# Altium PCB seyed_parsa_parsaian.PcbDoc
Units mm, origin at the board's own origin, x right, y up, seen from the top; angles counter-clockwise.
Board outline 99.82 x 75.06 mm, 2 copper layers (Top Layer, Bottom Layer); 28 components, 23 nets, 118 pads, 52 vias.
Unrouted connection lines stored in the file: 1.
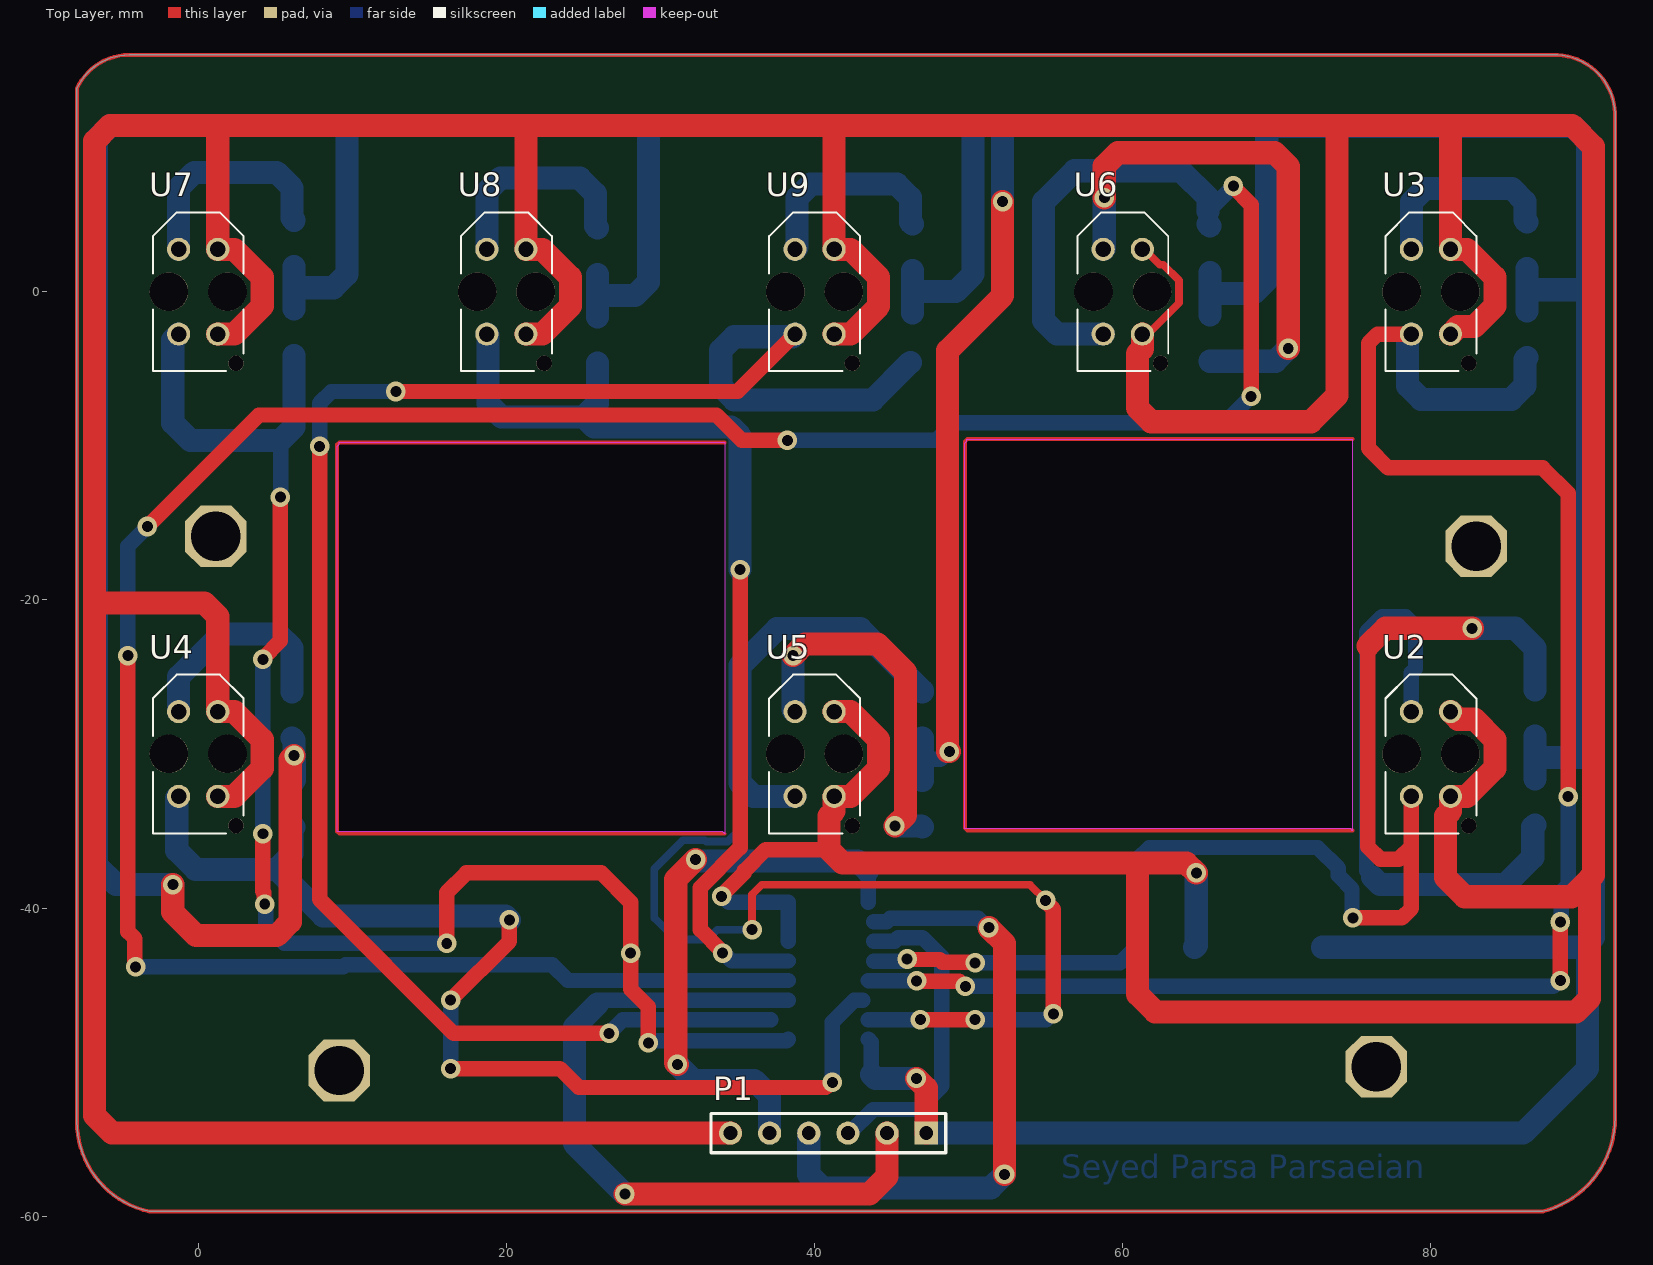
[diagram p0: Top Layer view]
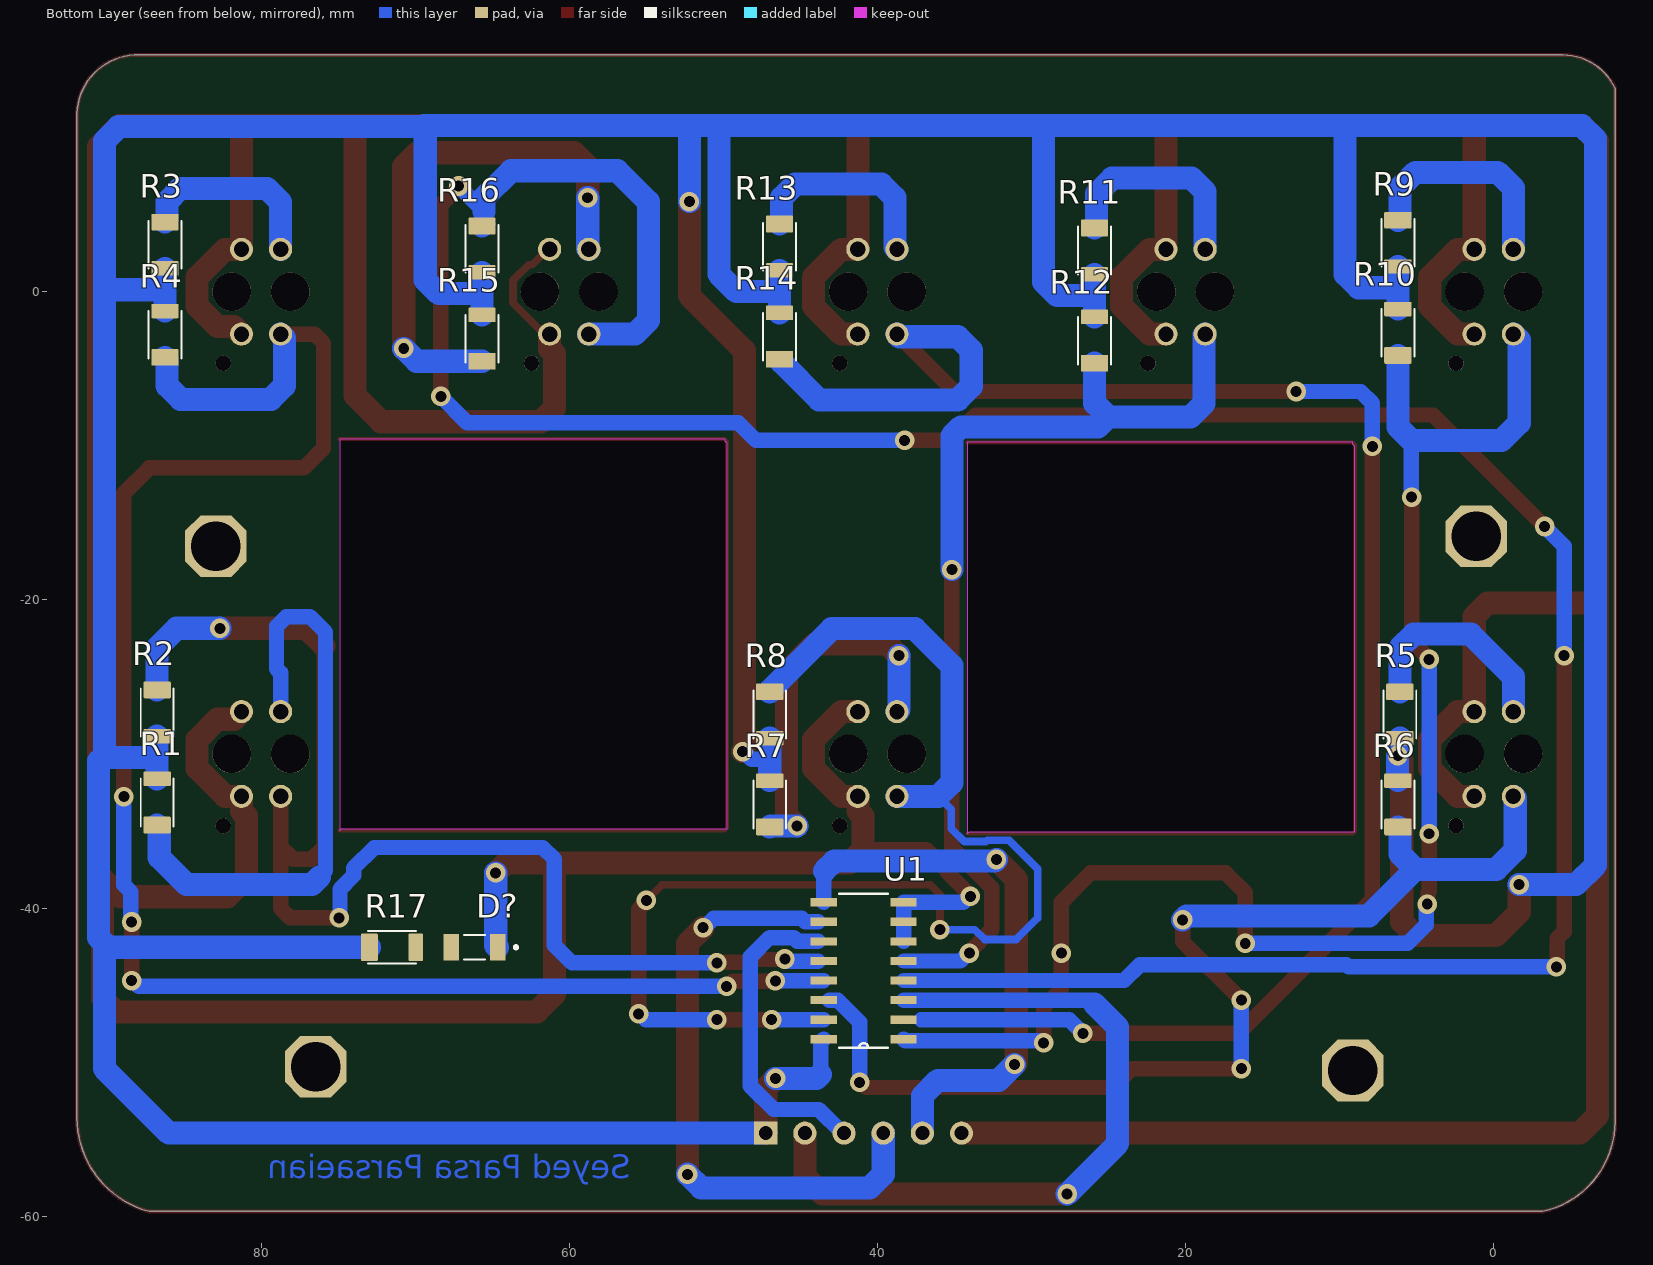
[diagram p1: Bottom Layer view, seen from below]
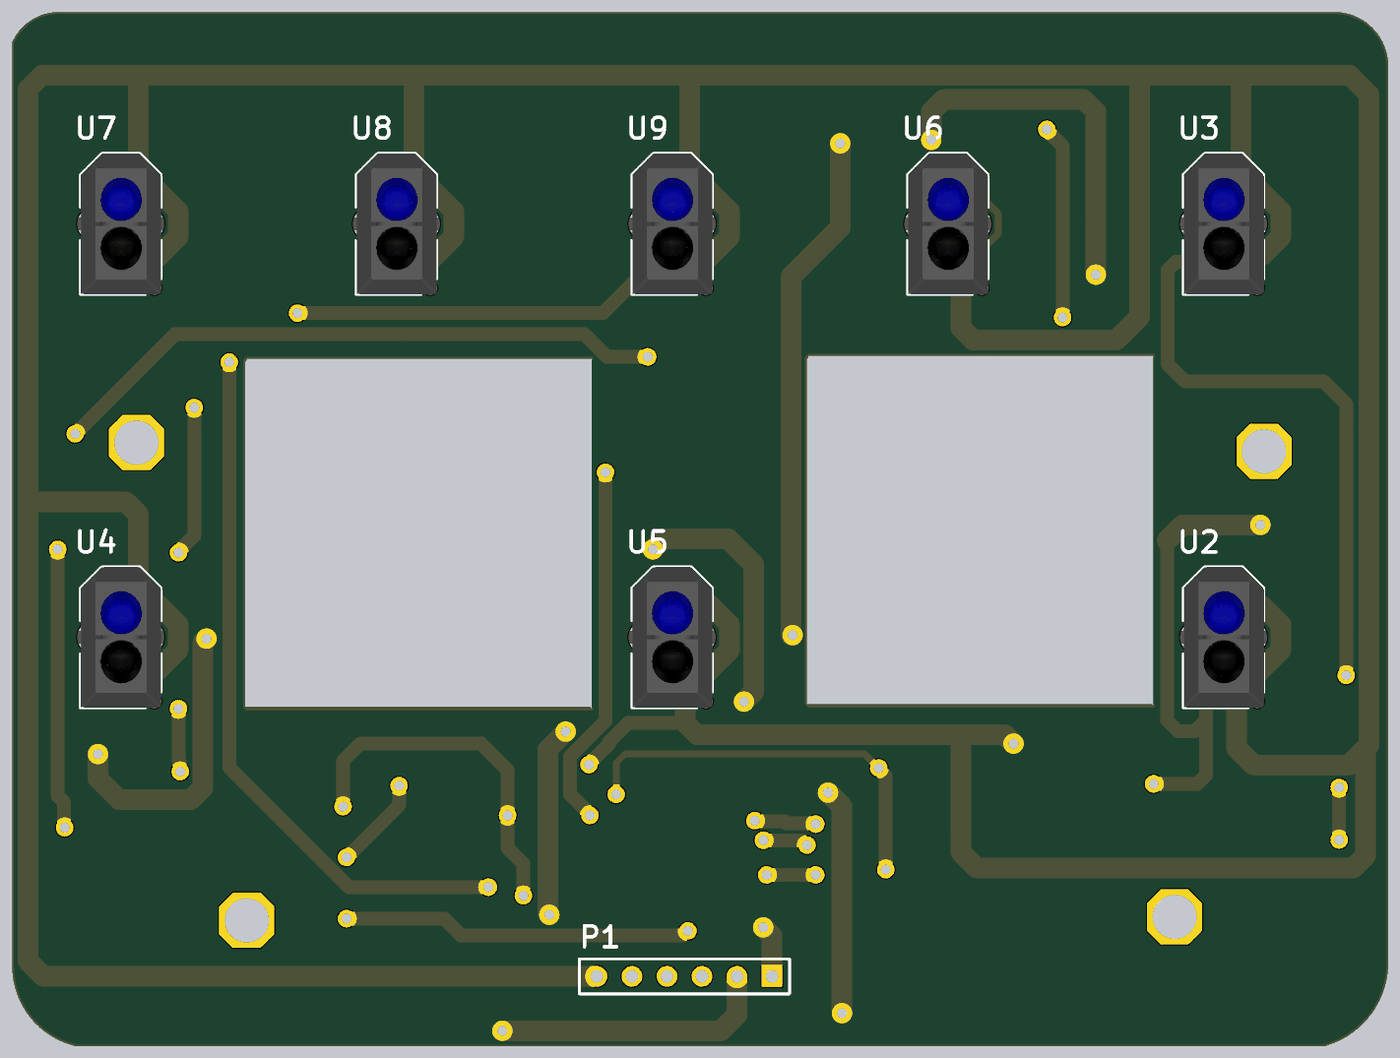
[diagram p2: 3D render of the assembled board from above, using the file's embedded part models]
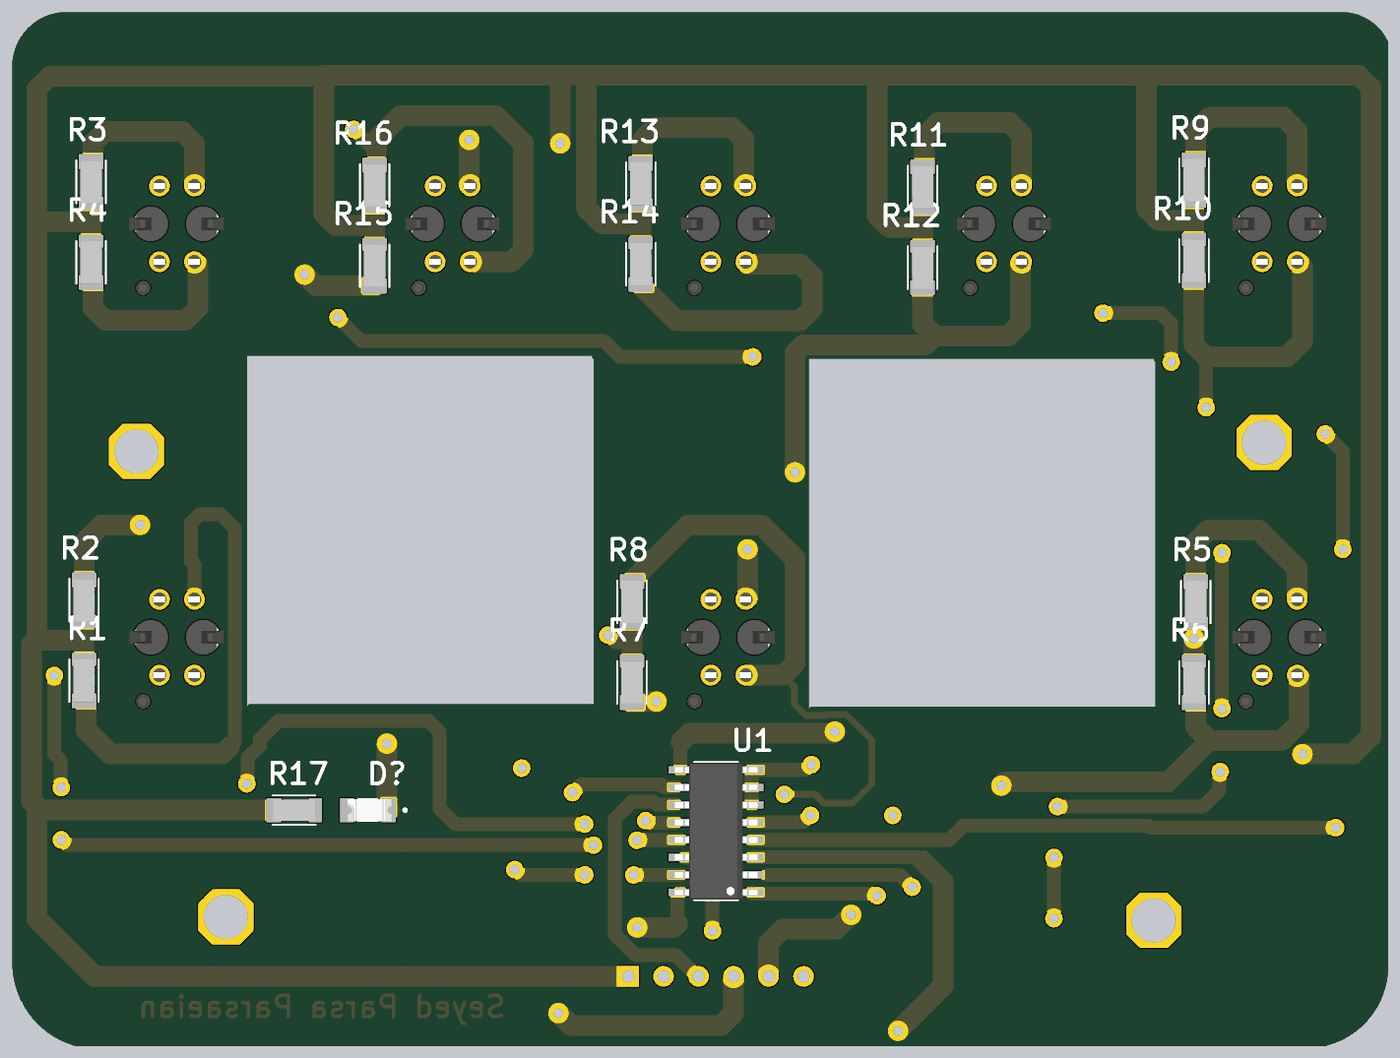
[diagram p3: 3D render of the assembled board from below, using the file's embedded part models]

## Layer stack, top to bottom
Top Solder: solder mask 0.0102, Solder Resist, Dk 3.5
Top Layer: signal copper 0.0356
Dielectric 1: dielectric 0.32, FR-4, Dk 4.8
Bottom Layer: signal copper 0.0356
Bottom Solder: solder mask 0.0102, Solder Resist, Dk 3.5

## Board outline
-7.874,-53.854 -7.874,13.183 cw(c-4.483,11.642) -4.483,15.367 88.211,15.367 cw(c88.014,11.433) 91.948,11.236 91.948,-53.608 cw(c85.659,-53.608) 87.26,-59.69 -3.178,-59.69 cw(c-1.9,-53.854)
cut-out: 49.888,-9.569 74.907,-9.569 74.907,-34.969 74.78,-34.842 49.761,-34.842 49.761,-9.823 49.888,-9.696
cut-out: 9.144,-9.779 34.163,-9.779 34.163,-35.179 34.036,-35.052 9.017,-35.052 9.017,-10.033 9.144,-9.906
cut-out: 9.144,-9.779 34.163,-9.779 34.163,-35.179 34.036,-35.052 9.017,-35.052 9.017,-10.033 9.144,-9.906

## Design rules (kind name [scope] priority, off if disabled: settings)
Clearance [All] p1: gap=0.254 ignorepadtopadclearanceinfootprint=FALSE except(0: Arc-Hole Track-Hole SMDPad-Hole THPad-Hole Via-Hole Fill-Hole Poly-Hole Region-Hole Text-Hole)
PolygonConnect [All] p1: connectstyle=Relief reliefconductorwidth=0.254 reliefentries=4 polygonreliefangle="90 Angle" airgapwidth=0.254
RoutingVias [All] p1: holewidth=0.711 width=1.27 viastyle="Through Hole" minholewidth=0.711 minwidth=1.27 maxholewidth=0.711 maxwidth=1.27
SolderMaskExpansion [All] p1: expansion=0.102 istentingtop=FALSE
Width [All] p1: maxlimit=1.5 minlimit=0.5 preferedwidth=1 minimp=50.000000 maximp=50.000000 favimp=50.000000
30 further rules are at their usual default settings.

## Components (designator, comment, footprint, x,y, rotation, side; value= is the part's Value field where it differs from the comment)
D? "LHN974_RED_LED_1206" LEDC3216X120N 66.153,-42.545 r0 bottom
P1 "Header 6" HDR1X6 47.244,-54.61 r180 top
R1 "4-1879462-2" RESC3115X65N 86.741,-33.147 r90 bottom
R2 "4-1879462-2" RESC3115X65N 86.741,-27.305 r270 bottom
R3 "4-1879462-2" RESC3115X65N 86.233,3.048 r270 bottom
R4 "4-1879462-2" RESC3115X65N 86.233,-2.794 r90 bottom
R5 "4-1879462-2" RESC3115X65N 6.096,-27.432 r270 bottom
R6 "4-1879462-2" RESC3115X65N 6.223,-33.274 r90 bottom
R7 "4-1879462-2" RESC3115X65N 46.99,-33.274 r90 bottom
R8 "4-1879462-2" RESC3115X65N 46.99,-27.432 r270 bottom
R9 "4-1879462-2" RESC3115X65N 6.223,3.175 r270 bottom
R10 "4-1879462-2" RESC3115X65N 6.223,-2.667 r90 bottom
R11 "4-1879462-2" RESC3115X65N 25.908,2.667 r270 bottom
R12 "4-1879462-2" RESC3115X65N 25.908,-3.175 r90 bottom
R13 "4-1879462-2" RESC3115X65N 46.355,2.921 r270 bottom
R14 "4-1879462-2" RESC3115X65N 46.355,-2.921 r90 bottom
R15 "4-1879462-2" RESC3115X65N 65.659,-3.048 r90 bottom
R16 "4-1879462-2" RESC3115X65N 65.659,2.794 r270 bottom
R17 "4-1879462-2" RESC3115X65N 71.501,-42.545 r180 bottom
U1 "74HC4051D" SOIC127P600X175-16N 40.894,-44.069 r0 bottom
U2 "TCRT5000" OPTO_TCRT5000 80,-30 r90 top
U3 "TCRT5000" OPTO_TCRT5000 80,0 r90 top
U4 "TCRT5000" OPTO_TCRT5000 0,-30 r90 top
U5 "TCRT5000" OPTO_TCRT5000 40,-30 r90 top
U6 "TCRT5000" OPTO_TCRT5000 60,0 r90 top
U7 "TCRT5000" OPTO_TCRT5000 0,0 r90 top
U8 "TCRT5000" OPTO_TCRT5000 20,0 r90 top
U9 "TCRT5000" OPTO_TCRT5000 40,0 r90 top

## Footprints (in the part's own frame and the unit in brackets; to place one, negate y for a bottom-side part, rotate by r counter-clockwise, add the part's x,y. Pads: shape width x height; smd on the part's side, far side on the other; paste and mask are expansions set on the pad)
HDR1X6 [mm] "Connector; Header; 6 Position"
  rect 1.5x1.5 hole 0.9: 1(0,0)
  round 1.5 hole 0.9: 2(2.54,0) 3(5.08,0) 4(7.62,0) 5(10.16,0) 6(12.7,0)
  silkscreen extent -1.27,-1.27 13.97,1.27
LEDC3216X120N [mm]
  rect 1.01x1.73 smd: NEG(1.51,0) POS(-1.51,0)
  silkscreen extent -2.8,-0.8 0.68,0.8, body extent -1.73,-0.8 1.47,0.8, height 1.2
OPTO_TCRT5000 [mm]
  round 1.5 hole 1: A(2.75,1.27) CATH(2.75,-1.27) COLL(-2.75,1.27) E(-2.75,-1.27)
  round 1 hole 1 unplated: ""(-4.65,-2.45)
  round 2.5 hole 2.5 unplated: ""(0,1.9) ""(0,-1.9)
  silkscreen extent -5.15,-2.95 5.15,2.95, body extent -5.1,-3.43 5.1,3.37, height 7.2
RESC3115X65N [mm]
  rrect14% 1.09x1.77 smd: 1(-1.465,0)
  rrect14% 0.94x1.77 smd: 2(1.54,0)
  silkscreen extent -1.55,-1.06 1.55,1.06, body extent -1.55,-0.77 1.55,0.77, height 0.53
SOIC127P600X175-16N [mil]
  rect 67x21 smd: 1(-102,175) 2(-102,125) 3(-102,75) 4(-102,25) 5(-102,-25) 6(-102,-75) 7(-102,-125) 8(-102,-175) 9(102,-175) 10(102,-125) 11(102,-75) 12(102,-25) 13(102,25) 14(102,75) 15(102,125) 16(102,175)
  silkscreen extent -62,-197 62,197, body extent -118,-195 118,195, height 69

## Part data
D?: "2.6 V Red LED SMD", Package=None, Availability="Not in stock", Check_prices=https://www.snapeda.com/parts/LHN974%20RED%20LED%201206/Osram/view-part/7899607/?ref=eda, MF=Osram, MP="LHN974 RED LED 1206", Price=None, SnapEDA_Link=https://www.snapeda.com/parts/LHN974%20RED%20LED%201206/Osram/view-part/7899607/?ref=snap
P1: "Header, 6-Pin", LatestRevisionDate=17-Jul-2002, LatestRevisionNote="Re-released for DXP Platform.", Publisher="Altium Limited"
R1 R2 R3 R4 R5 R6 R7 R8 R9 R10 R11 R12 R13 R14 R15 R16 R17: "RES 0.82 OHM 1% 1/4W 1206", Package=1206, Power_Rating=".25 W", Resistance=82, Tolerance=1%, Availability="In Stock", Check_prices=https://www.snapeda.com/parts/4-1879462-2/TE+Connectivity/view-part/?ref=eda, EU_RoHS_Compliance="Compliant with Exemptions", MF="TE Connectivity", MP=4-1879462-2, Price=None, SnapEDA_Link=https://www.snapeda.com/parts/4-1879462-2/TE+Connectivity/view-part/?ref=snap
U1: "1 Circuit IC Switch 8:1 130Ohm 16-SOIC", Package="SOIC-16 Toshiba", Availability="In Stock", Check_prices=https://www.snapeda.com/parts/74HC4051D/Toshiba/view-part/?ref=eda, MF=Toshiba, MP=74HC4051D, Price=None, Purchase-URL=https://pricing.snapeda.com/search/part/74HC4051D/?ref=eda, SnapEDA_Link=https://www.snapeda.com/parts/74HC4051D/Toshiba/view-part/?ref=snap
U2 U3 U4 U5 U6 U7 U8 U9: "950 nm 60 mA Through Hole Reflective Optical Sensor with Transistor Output", Package=None, Availability=Unavailable, MP=TCRT5000, Price=None

## Free pads (board coordinates)
  oct 4x4 hole 3.2: 6(1.143,-15.875) 6(9.144,-50.546) 6(76.454,-50.292) 6(82.931,-16.51)

## Via types
v1: diameter 1.27, hole 0.711, Top Layer to Bottom Layer, 52 vias

## Nets (pads, with @x,y where several pads share a name; then routed paths per layer and width w, separated by ;. In a path a pad name is that pad's centre, name@x,y a point inside that pad or via, vN(x,y) a via of type N, cw(c..) or ccw(c..) an arc to the next point about the centre after c; other vN are vias at no path point)
+5: P1.1 R1.2 R2.2 R3.2 R4.2 R5.2 R6.2 R7.2 R8.2 R9.2 R10.2 R11.2 R12.2 R13.2 R14.2 R15.2 R16.2 R17.1 U1.16 | length 432.4
  Top Layer w1.5: v1(-1.651,-38.481) -1.651,-40.259 -0.127,-41.783 5.09,-41.783 5.969,-40.904 5.969,-30.353 v1(6.223,-30.099) ; v1(46.609,-51.054) 47.244,-51.689 P1.1 ; v1(48.745,-29.845) 48.63,-29.845 48.63,-3.821 52.197,-0.254 v1(52.197,5.842)
  Bottom Layer w1: U1.16 43.688,-48.717 43.688,-50.8 ; 46.99,-30.353 48.163,-30.353 48.671,-29.845 v1(48.745,-29.845)
  Bottom Layer w1.5: v1(-1.651,-38.481) -5.334,-38.481 -6.604,-37.211 -6.604,9.9 -5.725,10.779 9.652,10.779 ; R5.2 6.223,-29.099 v1(6.223,-30.099) 6.257,-30.133 6.257,-31.7 R6.2 ; R10.2 6.223,0.254 ; R9.2 6.223,0.254 ; R12.2 25.908,-0.254 ; R11.2 25.908,-0.254 ; 43.688,-50.8 43.942,-51.054 v1(46.609,-51.054) ; R14.2 46.355,0 ; R13.2 46.355,0 ; R7.2 46.99,-30.353 R8.2 ; P1.1 85.979,-54.61 90.17,-50.419 90.17,-42.291 ; v1(52.197,5.842) 52.197,10.779 ; R15.2 65.659,-0.127 ; R16.2 65.659,-0.127 ; R17.1 89.916,-42.545 90.17,-42.291 ; R4.2 86.233,0.127 ; R3.2 86.233,0.127 ; R1.2 86.741,-30.226 ; R2.2 86.741,-30.226 ; 6.223,0.254 8.773,0.254 9.652,1.133 9.652,10.779 ; 9.652,10.779 29.21,10.779 ; 25.908,-0.254 28.331,-0.254 29.21,0.625 29.21,10.779 ; 29.21,10.779 50.292,10.779 ; 46.355,0 49.149,0 50.292,1.143 50.292,10.779 ; 50.292,10.779 52.197,10.779 ; 52.197,10.779 69.406,10.779 69.342,10.715 ; 65.659,-0.127 68.463,-0.127 69.342,0.752 69.342,10.715 ; 69.342,10.715 89.234,10.715 90.17,9.779 90.17,0.254 ; 86.233,0.127 90.043,0.127 90.17,0.254 ; 86.741,-30.226 90.043,-30.226 90.17,-30.099 ; 90.17,-42.291 90.539,-41.922 90.539,-30.468 90.17,-30.099 ; 90.17,-30.099 90.17,0.254
GND: D?.POS P1.6 U1.6 U1.7 U1.8 U2.CATH U2.E U3.CATH U3.E U4.CATH U4.E U5.CATH U5.E U6.CATH U6.E U7.CATH U7.E U8.CATH U8.E U9.CATH U9.E | length 516.6
  Top Layer w0.5: U6.E 61.461,-2.559 61.822,-2.559 63.654,-0.727 63.654,0.727 62.627,1.754 62.395,1.754 61.399,2.75 U6.CATH
  Top Layer w1: v1(33.972,-39.244) 33.972,-39.171 35.437,-37.705 35.437,-37.588 36.82,-36.205 40.946,-36.205 ; U6.CATH U6.CATH@61.305,2.785
  Top Layer w1.5: U4.E 2.338,-32.75 4.154,-30.934 4.154,-29.066 2.338,-27.25 U4.CATH 1.27,-21.072 0.391,-20.193 -6.731,-20.193 ; U7.E 2.338,-2.75 4.154,-0.934 4.154,0.934 2.338,2.75 U7.CATH 1.27,10.795 ; U8.E 22.338,-2.75 24.154,-0.934 24.154,0.934 22.338,2.75 U8.CATH 21.27,10.729 21.336,10.795 ; P1.6 -5.588,-54.61 -6.731,-53.467 -6.731,-20.193 ; U5.CATH 42.338,-27.25 44.154,-29.066 44.154,-30.934 42.338,-32.75 U5.E 41.27,-33.703 40.946,-34.027 40.946,-36.205 41.825,-37.084 60.96,-37.084 ; U9.E 42.338,-2.75 44.154,-0.934 44.154,0.934 42.338,2.75 U9.CATH 41.27,10.79 41.275,10.795 ; U6.E 61.27,-3.703 60.946,-4.027 60.946,-7.535 61.849,-8.438 72.207,-8.438 73.914,-6.731 73.914,10.668 74.041,10.795 ; v1(64.77,-37.719) 64.135,-37.084 60.96,-37.084 ; U2.CATH 81.766,-27.746 82.834,-27.746 84.154,-29.066 84.154,-30.934 82.338,-32.75 U2.E 81.27,-33.703 80.946,-34.027 80.946,-38.02 82.193,-39.267 89.13,-39.267 90.297,-38.1 ; U3.E 81.766,-2.254 82.834,-2.254 84.154,-0.934 84.154,0.934 82.338,2.75 U3.CATH 81.27,10.658 81.407,10.795 ; -6.731,-20.193 -6.731,9.779 -5.715,10.795 1.27,10.795 ; 1.27,10.795 21.336,10.795 ; 21.336,10.795 41.275,10.795 ; 41.275,10.795 74.041,10.795 ; 60.96,-37.084 60.96,-45.593 62.103,-46.736 89.418,-46.736 90.297,-45.857 90.297,-38.1 ; 74.041,10.795 81.407,10.795 ; 81.407,10.795 89.154,10.795 90.539,9.41 90.539,-37.858 90.297,-38.1
  Bottom Layer w1: v1(33.972,-39.244) 34.045,-39.244 34.424,-39.624 U1.8 U1.7 U1.6
  Bottom Layer w1.5: D?.POS 64.655,-42.545 64.77,-42.43 v1(64.77,-37.719)
NetD?_NEG: D?.NEG R17.2
NetR1_1: R1.1 U2.A | length 39
  Bottom Layer w1: 76.2,-37.973 75.819,-37.592 75.819,-22.098 76.835,-21.082 78.359,-21.082 78.994,-21.717 78.994,-24.474 78.73,-24.738 U2.A
  Bottom Layer w1.5: 76.2,-37.973 76.708,-38.481 84.836,-38.481 86.606,-36.711 86.606,-34.747 R1.1
NetR3_1: R3.1 U3.A | length 12.5
  Bottom Layer w1.5: U3.A 78.74,2.76 78.74,5.825 79.619,6.704 85.246,6.704 86.098,5.852 86.098,4.648 R3.1
NetR5_1: R5.1 U4.A | length 14
  Bottom Layer w1.5: U4.A -1.27,-24.987 1.492,-22.225 5.207,-22.225 6.096,-23.114 R5.1
NetR7_1: R7.1 U5.A | length 24.1
  Top Layer w1.5: v1(38.608,-23.622) 39.37,-22.86 44.069,-22.86 45.908,-24.699 45.908,-33.975 v1(45.212,-34.671)
  Bottom Layer w1.5: v1(38.608,-23.622) 38.608,-27.128 U5.A ; v1(45.212,-34.671) 46.922,-34.671 R7.1
NetR9_1: R9.1 U7.A | length 14.3
  Bottom Layer w1.5: U7.A -1.27,6.731 -0.254,7.747 5.08,7.747 6.088,6.739 6.088,4.775 R9.1
NetR11_1: R11.1 U8.A | length 13.8
  Bottom Layer w1.5: U8.A 18.73,6.487 19.609,7.366 24.765,7.366 25.773,6.358 25.773,4.267 R11.1
NetR13_1: R13.1 U9.A | length 13.3
  Bottom Layer w1.5: U9.A 38.862,2.882 38.862,6.106 39.741,6.985 45.341,6.985 46.22,6.106 46.22,4.521 R13.1
NetR15_1: R15.1 U6.A | length 35.3
  Top Layer w1.5: v1(58.801,6.096) 58.801,8.138 59.68,9.017 69.85,9.017 70.739,8.128 v1(70.739,-3.683)
  Bottom Layer w1.5: U6.A 58.801,2.821 v1(58.801,6.096) ; R15.1 69.909,-4.513 v1(70.739,-3.683)
output: P1.2 U1.3 | length 47.1
  Top Layer w1.5: v1(27.686,-58.559) 43.549,-58.559 44.704,-57.404 P1.2
  Bottom Layer w1: 25.908,-46.228 26.162,-45.974 U1.3
  Bottom Layer w1.5: 25.908,-46.228 24.408,-47.728 24.408,-55.281 v1(27.686,-58.559)
S0: P1.3 U1.11 | length 20.8
  Bottom Layer w1: P1.3 42.27,-54.61 43.808,-53.072 46.718,-53.072 48.252,-51.538 48.252,-43.172 46.998,-41.918 45.425,-41.918 45.195,-42.148 U1.11@43.836,-42.148
S1: P1.4 U1.10 | length 40.3
  Top Layer w1.5: v1(51.308,-41.275) 52.324,-42.291 v1(52.324,-57.277)
  Bottom Layer w1: U1.10@43.836,-40.878 44.692,-40.878 44.906,-40.664 50.624,-40.664 51.235,-41.275 v1(51.308,-41.275)
  Bottom Layer w1.5: P1.4 39.624,-57.287 40.503,-58.166 51.435,-58.166 v1(52.324,-57.277)
S2: P1.5 U1.9 | length 36.6
  Top Layer w1.5: v1(31.091,-50.141) 30.988,-50.038 30.988,-38.137 v1(32.276,-36.848)
  Bottom Layer w1: 43.434,-37.592 43.485,-37.643 U1.9
  Bottom Layer w1.5: v1(31.091,-50.141) 32.131,-51.181 36.068,-51.181 37.084,-52.197 P1.5 ; v1(32.276,-36.848) 32.385,-36.957 42.799,-36.957 43.434,-37.592
Y0: R4.1 U1.13 U3.COLL | length 114.8
  Top Layer w1: v1(46.621,-44.728) 46.656,-44.763 49.389,-44.763 49.711,-45.085 v1(49.784,-45.085) ; U3.COLL 76.532,-2.75 75.946,-3.336 75.946,-10.16 77.216,-11.43 87.249,-11.43 88.9,-13.081 v1(88.9,-32.766) ; v1(88.392,-44.704) v1(88.392,-40.906)
  Bottom Layer w1: U1.13 43.497,-44.716 46.609,-44.716 v1(46.621,-44.728) ; v1(49.784,-45.085) 87.938,-45.085 88.319,-44.704 v1(88.392,-44.704) ; v1(88.392,-40.906) 88.444,-40.854 88.444,-38.957 88.9,-38.501 v1(88.9,-32.766)
  Bottom Layer w1.5: U3.COLL 78.486,-2.994 78.486,-6.106 79.365,-6.985 85.219,-6.985 86.098,-6.106 86.098,-4.394 R4.1
Y1: R6.1 U1.14 U4.COLL | length 73.4
  Top Layer w1: v1(16.383,-50.419) 23.472,-50.419 24.698,-51.645 40.738,-51.645 41.075,-51.308 v1(41.148,-51.308) ; v1(16.383,-45.974) 20.193,-42.164 v1(20.193,-40.767)
  Bottom Layer w1: v1(16.383,-50.419) v1(16.383,-45.974) ; v1(41.148,-51.308) 41.148,-47.397 42.555,-45.99 U1.14@43.134,-45.99
  Bottom Layer w1.5: U4.COLL -1.397,-32.877 -1.397,-36.254 -0.162,-37.489 5.082,-37.489 ; R6.1 6.088,-34.874 6.088,-36.483 5.082,-37.489 ; v1(20.193,-40.767) 19.939,-40.513 8.106,-40.513 5.082,-37.489
Y2: R8.1 U1.15 U5.COLL | length 87.4
  Top Layer w0.5: v1(35.941,-41.402) 35.941,-39.116 36.576,-38.481 53.975,-38.481 v1(54.991,-39.497)
  Top Layer w1: v1(46.863,-47.244) v1(50.419,-47.244) ; v1(54.991,-39.497) 54.991,-39.57 55.499,-40.078 v1(55.499,-46.863)
  Bottom Layer w0.5: v1(35.941,-41.402) 33.678,-41.402 33.043,-42.037 30.988,-42.037 29.591,-40.64 29.591,-37.465 31.462,-35.594 32.872,-35.594 32.961,-35.683 34.372,-35.683 35.209,-34.846 35.209,-33.587 36.046,-32.75
  Bottom Layer w1: U1.15 v1(46.863,-47.244) ; v1(50.419,-47.244) 55.045,-47.244 55.426,-46.863 v1(55.499,-46.863)
  Bottom Layer w1.5: U5.COLL 36.046,-32.75 35.167,-31.871 35.167,-24.269 37.568,-21.868 42.961,-21.868 46.99,-25.897 R8.1
Y3: R2.1 U1.12 U2.COLL | length 83.3
  Top Layer w1: v1(46.001,-43.307) 46.033,-43.339 48.124,-43.339 48.294,-43.509 50.367,-43.509 v1(50.419,-43.561) ; v1(74.93,-40.64) 78.105,-40.64 78.73,-40.015 78.73,-36 ; 75.911,-22.987 75.911,-36.033 76.708,-36.83 77.9,-36.83 78.73,-36 ; U2.COLL 78.73,-36
  Top Layer w1.5: 75.911,-22.987 77.054,-21.844 v1(82.677,-21.844)
  Bottom Layer w1: U1.12@43.836,-43.45 45.784,-43.45 45.928,-43.307 v1(46.001,-43.307) ; v1(50.419,-43.561) 59.817,-43.561 60.96,-42.418 60.96,-36.83 61.722,-36.068 72.644,-36.068 73.986,-37.41 73.986,-37.886 74.878,-38.778 74.878,-40.588 v1(74.93,-40.64)
  Bottom Layer w1.5: v1(82.677,-21.844) 85.471,-21.844 86.741,-23.114 R2.1
Y4: R10.1 U1.1 U7.COLL | length 98.9
  Top Layer w1: v1(4.191,-35.179) 4.191,-38.916 4.266,-38.991 4.266,-39.699 v1(4.318,-39.751) ; v1(4.191,-23.864) 4.191,-23.791 5.334,-22.648 v1(5.334,-13.335) ; v1(16.129,-42.291) 16.129,-38.989 17.399,-37.719 26.162,-37.719 28.067,-39.624 v1(28.067,-42.926) 28.067,-45.268 29.21,-46.411 v1(29.21,-48.752)
  Bottom Layer w1: v1(4.191,-35.179) v1(4.191,-23.864) ; v1(4.318,-39.751) 4.37,-39.803 4.37,-41.07 5.59,-42.291 v1(16.129,-42.291) ; v1(5.334,-13.335) 5.344,-13.325 5.344,-9.652 ; v1(29.21,-48.752) 29.283,-48.752 29.418,-48.617 38.2,-48.617 U1.1
  Bottom Layer w1.5: U7.COLL -1.651,-3.131 -1.651,-8.509 -0.508,-9.652 5.344,-9.652 6.223,-8.773 R10.1
Y5: R12.1 U1.5 U8.COLL | length 65.3
  Top Layer w1: v1(34.036,-42.926) 34.036,-42.853 32.583,-41.399 32.583,-38.669 35.167,-36.085 v1(35.167,-18.034)
  Bottom Layer w1: v1(34.036,-42.926) 34.109,-42.926 34.617,-43.434 U1.5
  Bottom Layer w1.5: U8.COLL 18.796,-2.816 18.796,-7.249 19.675,-8.128 25.029,-8.128 ; R12.1 25.908,-7.249 25.029,-8.128 ; v1(35.167,-18.034) 35.167,-9.363 34.579,-8.775 25.676,-8.775 25.029,-8.128
Y6: R14.1 U1.2 U9.COLL | length 119.4
  Top Layer w1: v1(7.874,-10.033) 7.874,-39.429 16.578,-48.133 v1(26.67,-48.133) ; v1(12.827,-6.477) 35.003,-6.477 U9.COLL
  Bottom Layer w1: v1(7.874,-10.033) 7.874,-7.239 8.636,-6.477 v1(12.827,-6.477) ; v1(26.67,-48.133) 27.543,-47.26 37.171,-47.26
  Bottom Layer w1.5: U9.COLL 38.559,-2.921 34.788,-2.921 33.909,-3.8 33.909,-6.142 34.788,-7.021 43.79,-7.021 R14.1@46.22,-4.591
Y7: R16.1 U1.4 U6.COLL | length 191.2
  Top Layer w1: v1(-4.572,-23.622) -4.572,-41.529 -4.116,-41.985 -4.116,-43.763 v1(-4.064,-43.815) ; v1(-3.302,-15.24) 3.937,-8.001 33.634,-8.001 35.285,-9.652 v1(38.227,-9.652) ; v1(67.183,6.858) 67.183,6.785 68.326,5.642 v1(68.326,-6.799)
  Bottom Layer w1: v1(-4.572,-23.622) -4.572,-16.51 v1(-3.302,-15.24) ; v1(-4.064,-43.815) 9.421,-43.815 9.556,-43.68 22.969,-43.68 23.993,-44.704 U1.4 ; v1(38.227,-9.652) 47.879,-9.652 49.022,-8.509 66.616,-8.509 v1(68.326,-6.799) ; R16.1@65.532,4.386 65.532,5.207 v1(67.183,6.858)
  Bottom Layer w1.5: U6.COLL 55.743,-2.75 54.864,-1.871 54.864,5.842 56.872,7.85 63.778,7.85 65.532,6.096 65.532,5.207 ; R16.1@65.532,4.386 R16.1
pads on no net: U2. U3. U4. U5. U6. U7. U8. U9.
copper on no net: | length 568.1
  Top Layer w0.254: 49.761,-9.821 49.761,-34.821 49.909,-34.969 74.909,-34.969 ; 49.761,-9.718 49.909,-9.569 74.909,-9.569 ; 9.017,-35.03 9.017,-10.03 9.017,-35.03 ; 9.017,-35.03 9.166,-35.179 ; 9.017,-35.03 9.166,-35.179 ; 9.166,-35.179 34.166,-35.179 9.166,-35.179 ; 9.166,-9.779 34.166,-9.779 9.166,-9.779 ; 9.166,-9.779 9.017,-9.928 9.166,-9.779 ; -7.874,-53.854 ccw(c-1.9,-53.854) -3.178,-59.69 87.26,-59.69 ccw(c85.659,-53.608) 91.948,-53.608 91.948,11.236 ccw(c88.014,11.433) 88.211,15.367 -4.483,15.367 ccw(c-4.483,11.642) -7.874,13.183 -7.874,-53.854

## Other copper
Bottom Layer:
  text "Seyed Parsa Parsaeian" at 56.007,-57.531 h1.52